# Altium PCB PCB尺子1.pcbdoc (part 1 of 2)
Units mm, origin at the board's own origin, x right, y up, seen from the top; angles counter-clockwise.
Board outline 210 x 40 mm, 2 copper layers (Top Layer, Bottom Layer); 15 components, 42 nets, 33 pads, 0 vias.
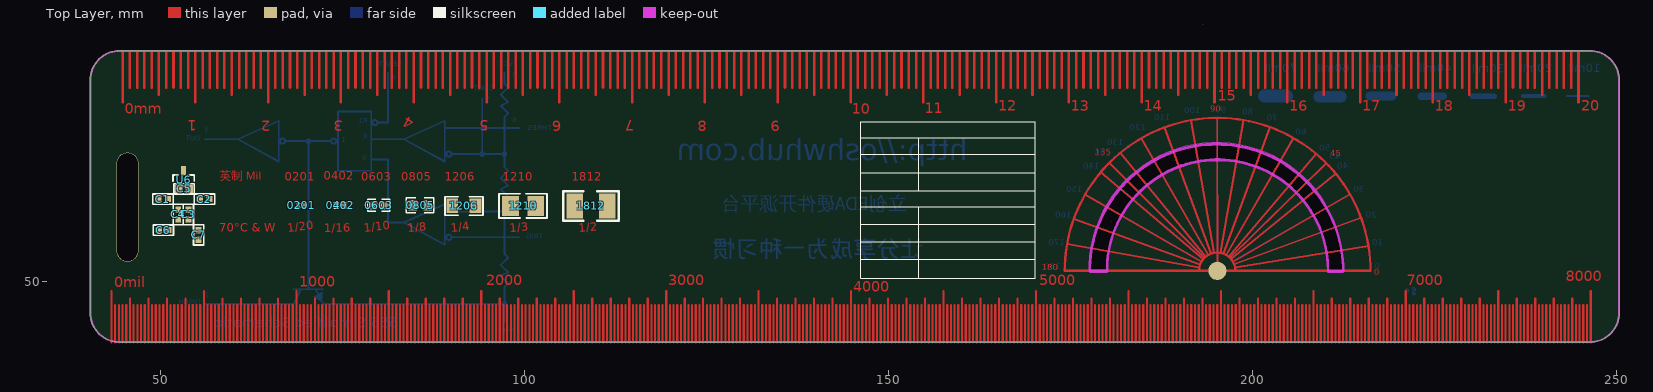
[diagram p0: Top Layer view]
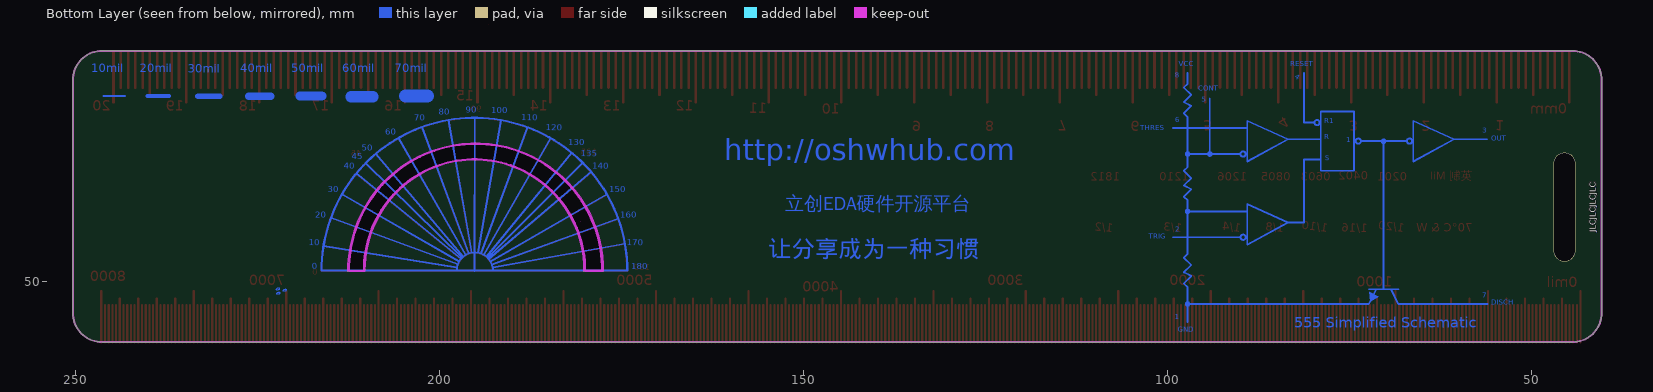
[diagram p1: Bottom Layer view, seen from below]

## Layer stack, top to bottom
Top Solder: solder mask 0.0102, Solder Resist, Dk 3.5
Top Layer: signal copper 0.0356
Dielectric1: dielectric 0.32, FR-4, Dk 4.8
Bottom Layer: signal copper 0.0356
Bottom Solder: solder mask 0.0102, Solder Resist, Dk 3.5

## Board outline
40.4,45.653 40.4,77.653 cw(c44.4,77.653) 44.4,81.653 246.4,81.653 cw(c246.4,77.653) 250.4,77.653 250.4,45.653 cw(c246.4,45.653) 246.4,41.653 44.4,41.653 cw(c44.4,45.653)
cut-out: 177.69,51.442 177.688,52.064 177.772,53.307 177.945,54.541 178.206,55.759 178.553,56.955 178.985,58.123 179.499,59.257 180.093,60.352 180.764,61.401 181.509,62.4 182.322,63.343 183.202,64.225 184.142,65.042 185.138,65.79 186.185,66.464 187.278,67.062 188.41,67.581 189.577,68.016 190.772,68.368 191.989,68.633 193.222,68.81 194.464,68.898 195.71,68.898 196.952,68.808 198.185,68.629 199.402,68.363 200.596,68.011 201.763,67.574 202.895,67.055 203.987,66.456 205.033,65.78 206.029,65.031 206.968,64.213 207.846,63.33 208.659,62.387 209.403,61.387 210.072,60.337 210.666,59.242 211.179,58.107 211.61,56.938 211.956,55.742 212.215,54.524 212.387,53.29 212.47,52.047 212.467,51.425 210.426,51.425 210.42,52.025 210.337,53.222 210.16,54.409 209.89,55.578 209.528,56.722 209.078,57.834 208.54,58.907 207.92,59.935 207.221,60.91 206.447,61.827 205.603,62.68 204.694,63.463 203.726,64.173 202.706,64.804 201.638,65.352 200.531,65.815 199.391,66.188 198.224,66.471 197.04,66.66 195.843,66.756 194.643,66.756 193.447,66.662 192.262,66.474 191.095,66.193 189.955,65.821 188.847,65.36 187.779,64.812 186.757,64.183 185.789,63.474 184.879,62.691 184.034,61.839 183.259,60.923 182.559,59.949 181.937,58.922 181.399,57.85 180.947,56.738 180.584,55.594 180.313,54.426 180.134,53.239 180.05,52.042 180.044,51.442 180.043,51.442
cut-out: 180.721,58.166

## Design rules (kind name [scope] priority, off if disabled: settings)
Clearance [All] p1: gap=0.254 ignorepadtopadclearanceinfootprint=FALSE except(0: Arc-Hole Track-Hole SMDPad-Hole THPad-Hole Via-Hole Fill-Hole Poly-Hole Region-Hole Text-Hole)
PolygonConnect [All] p1: connectstyle=Relief reliefconductorwidth=0.254 reliefentries=4 polygonreliefangle="90 Angle" airgapwidth=0.254
RoutingVias [All] p1: holewidth=0.711 width=1.27 viastyle="Through Hole" minholewidth=0.711 minwidth=1.27 maxholewidth=0.711 maxwidth=1.27
SolderMaskExpansion [All] p1: expansion=0.102
Width [All] p1: maxlimit=0.254 minlimit=0.254 preferedwidth=0.254
30 further rules are at their usual default settings.

## Components (designator, comment, footprint, x,y, rotation, side; value= is the part's Value field where it differs from the comment)
0201 "0201" 0201 69.385,60.439 r0 top
0402 "0402" 0402 74.716,60.439 r0 top
0603 "0603" 0603 80.016,60.439 r0 top
0805 "0805" 0805 85.7,60.439 r0 top
1206 "1206" 1206 91.707,60.353 r0 top
1210 "1210" 1210 99.846,60.353 r0 top
1812 "1812" 1812 109.15,60.353 r0 top
C1 "C0402" C0402 50.366,61.289 r180 top
C2 "C0402" C0402 56.066,61.289 r180 top
C3 "C0402" C0402 53.866,59.189 r90 top
C4 "C0402" C0402 52.466,59.189 r90 top
C5 "C0402" C0402 53.266,62.689 r0 top
C6 "C0402" C0402 50.416,57.039 r180 top
C7 "C0402" C0402 55.266,56.389 r90 top
U6 "SOT-23(SOT-23-3)" SOT-23(SOT-23-3) 53.216,63.939 r0 top

## Footprints (in the part's own frame and the unit in brackets; to place one, negate y for a bottom-side part, rotate by r counter-clockwise, add the part's x,y. Pads: shape width x height; smd on the part's side, far side on the other; paste and mask are expansions set on the pad)
0201 [mil]
  rect 13.8x16 smd: 1(-13,0)
  rect 13.78x16 smd: 2(13,0)
  silkscreen extent -23,-11 23,11
0402 [mm]
  rect 0.6x0.65 smd: 1(-0.424,0) 2(0.424,0)
  silkscreen extent -0.82,-0.43 0.81,0.43
0603 [mm]
  rect 1x1.1 smd: 1(-0.7,0) 2(0.7,0)
  silkscreen extent -1.5,-0.8 1.5,0.8
0805 [mm]
  rect 1.16x1.45 smd: 1(-1.016,0) 2(1.016,0)
  silkscreen extent -1.9,-1.03 1.87,1.04
1206 [mm]
  rect 1.6x2 smd: 1(-1.6,0) 2(1.6,0)
  silkscreen extent -2.61,-1.27 2.62,1.27
1210 [mil]
  rect 90.56x106.3 smd: 1(-68,0) 2(68,0)
  silkscreen extent -130,-65 129,66
1812 [mil]
  rect 90x133.86 smd: 1(-88,0) 2(88,0)
  silkscreen extent -150,-80 150,80
C0402 [mil]
  rect 35.4x31.5 smd: 1(-25.6,0) 2(25.6,0)
  silkscreen extent -55,-28 55,28
SOT-23(SOT-23-3) [mm]
  rect 0.7x1.25 smd: 1(-0.95,-1.25) 2(0.95,-1.25) 3(0,1.25)
  silkscreen extent -1.46,-0.9 1.46,0.65

## Free pads (board coordinates)
  oval 3x15 hole 2.8 slot 14.8 at 90 deg copper offset 0,0: 1(45.5,60.203)
  round 2.5 smd: 3(195.216,51.439)

## Nets (pads, with @x,y where several pads share a name; then routed paths per layer and width w, separated by ;. In a path a pad name is that pad's centre, name@x,y a point inside that pad or via, vN(x,y) a via of type N, cw(c..) or ccw(c..) an arc to the next point about the centre after c; other vN are vias at no path point)
1: pad.3 | length 470
  Top Layer w0.254: 174.576,55.137 192.74,51.893 ; 175.495,58.576 192.851,52.305 ; 177.049,61.928 193.034,52.698 ; 179.208,65.005 193.28,53.051 ; 180.378,66.28 193.429,53.214 ; 181.878,67.646 193.588,53.36 ; 184.778,69.656 193.945,53.61 ; 187.965,71.149 194.341,53.795 ; 191.578,72.129 194.765,53.919 ; 195.204,72.453 pad.3@195.216,51.439 ; 195.625,53.906 198.799,72.151 ; 196.042,53.794 202.46,71.176 ; 196.435,53.611 205.666,69.688 ; 196.786,53.365 208.778,67.515 ; 196.95,53.216 210.17,66.231 ; 197.089,53.064 211.461,64.802 ; 197.342,52.706 213.434,61.957 ; 197.521,52.33 214.952,58.721 ; 197.643,51.878 215.974,54.846
  Top Layer w0.3: 192.701,51.456 cw(c195.19,51.456) 197.679,51.456 ; 174.25,51.453 cw(c195.25,51.453) 216.25,51.453 174.25,51.453
null: 
S$67: 
S$69: 
S$4983:  | length 7
  Top Layer w0.35: 44.822,74.625 44.822,81.625
S$4985:  | length 95
  Top Layer w0.35: 45.822,76.625 45.822,81.625 ; 55.822,76.625 55.822,81.625 ; 65.822,76.625 65.822,81.625 ; 75.822,76.625 75.822,81.625 ; 85.822,76.625 85.822,81.625 ; 95.822,76.625 95.822,81.625 ; 105.822,76.625 105.822,81.625 ; 115.822,76.625 115.822,81.625 ; 125.822,76.625 125.822,81.625 ; 135.822,76.625 135.822,81.625 ; 145.822,76.625 145.822,81.625 ; 155.822,76.625 155.822,81.625 ; 165.822,76.625 165.822,81.625 ; 175.822,76.625 175.822,81.625 ; 185.822,76.625 185.822,81.625 ; 195.822,76.625 195.822,81.625 ; 215.822,76.625 215.822,81.625 ; 225.822,76.625 225.822,81.625 ; 235.822,76.625 235.822,81.625
S$4987:  | length 100
  Top Layer w0.35: 46.822,76.625 46.822,81.625 ; 56.822,76.625 56.822,81.625 ; 66.822,76.625 66.822,81.625 ; 76.822,76.625 76.822,81.625 ; 86.822,76.625 86.822,81.625 ; 96.822,76.625 96.822,81.625 ; 106.822,76.625 106.822,81.625 ; 116.822,76.625 116.822,81.625 ; 126.822,76.625 126.822,81.625 ; 136.822,76.625 136.822,81.625 ; 146.822,76.625 146.822,81.625 ; 156.822,76.625 156.822,81.625 ; 166.822,76.625 166.822,81.625 ; 176.822,76.625 176.822,81.625 ; 186.822,76.625 186.822,81.625 ; 196.822,76.625 196.822,81.625 ; 206.822,76.625 206.822,81.625 ; 216.822,76.625 216.822,81.625 ; 226.822,76.625 226.822,81.625 ; 236.822,76.625 236.822,81.625
S$4989:  | length 100
  Top Layer w0.35: 47.822,76.625 47.822,81.625 ; 57.822,76.625 57.822,81.625 ; 67.822,76.625 67.822,81.625 ; 77.822,76.625 77.822,81.625 ; 87.822,76.625 87.822,81.625 ; 97.822,76.625 97.822,81.625 ; 107.822,76.625 107.822,81.625 ; 117.822,76.625 117.822,81.625 ; 127.822,76.625 127.822,81.625 ; 137.822,76.625 137.822,81.625 ; 147.822,76.625 147.822,81.625 ; 157.822,76.625 157.822,81.625 ; 167.822,76.625 167.822,81.625 ; 177.822,76.625 177.822,81.625 ; 187.822,76.625 187.822,81.625 ; 197.822,76.625 197.822,81.625 ; 207.822,76.625 207.822,81.625 ; 217.822,76.625 217.822,81.625 ; 227.822,76.625 227.822,81.625 ; 237.822,76.625 237.822,81.625
S$4991:  | length 100
  Top Layer w0.35: 48.822,76.625 48.822,81.625 ; 58.822,76.625 58.822,81.625 ; 68.822,76.625 68.822,81.625 ; 78.822,76.625 78.822,81.625 ; 88.822,76.625 88.822,81.625 ; 98.822,76.625 98.822,81.625 ; 108.822,76.625 108.822,81.625 ; 118.822,76.625 118.822,81.625 ; 128.822,76.625 128.822,81.625 ; 138.822,76.625 138.822,81.625 ; 148.822,76.625 148.822,81.625 ; 158.822,76.625 158.822,81.625 ; 168.822,76.625 168.822,81.625 ; 178.822,76.625 178.822,81.625 ; 188.822,76.625 188.822,81.625 ; 198.822,76.625 198.822,81.625 ; 208.822,76.625 208.822,81.625 ; 218.822,76.625 218.822,81.625 ; 228.822,76.625 228.822,81.625 ; 238.822,76.625 238.822,81.625
S$4993:  | length 120
  Top Layer w0.35: 49.822,75.625 49.822,81.625 ; 59.822,75.625 59.822,81.625 ; 69.822,75.625 69.822,81.625 ; 79.822,75.625 79.822,81.625 ; 89.822,75.625 89.822,81.625 ; 99.822,75.625 99.822,81.625 ; 109.822,75.625 109.822,81.625 ; 119.822,75.625 119.822,81.625 ; 129.822,75.625 129.822,81.625 ; 139.822,75.625 139.822,81.625 ; 149.822,75.625 149.822,81.625 ; 159.822,75.625 159.822,81.625 ; 169.822,75.625 169.822,81.625 ; 179.822,75.625 179.822,81.625 ; 189.822,75.625 189.822,81.625 ; 199.822,75.625 199.822,81.625 ; 209.822,75.625 209.822,81.625 ; 219.822,75.625 219.822,81.625 ; 229.822,75.625 229.822,81.625 ; 239.822,75.625 239.822,81.625
S$4995:  | length 100
  Top Layer w0.35: 50.822,76.625 50.822,81.625 ; 60.822,76.625 60.822,81.625 ; 70.822,76.625 70.822,81.625 ; 80.822,76.625 80.822,81.625 ; 90.822,76.625 90.822,81.625 ; 100.822,76.625 100.822,81.625 ; 110.822,76.625 110.822,81.625 ; 120.822,76.625 120.822,81.625 ; 130.822,76.625 130.822,81.625 ; 140.822,76.625 140.822,81.625 ; 150.822,76.625 150.822,81.625 ; 160.822,76.625 160.822,81.625 ; 170.822,76.625 170.822,81.625 ; 180.822,76.625 180.822,81.625 ; 190.822,76.625 190.822,81.625 ; 200.822,76.625 200.822,81.625 ; 210.822,76.625 210.822,81.625 ; 220.822,76.625 220.822,81.625 ; 230.822,76.625 230.822,81.625 ; 240.822,76.625 240.822,81.625
S$4997:  | length 100
  Top Layer w0.35: 51.822,76.625 51.822,81.625 ; 61.822,76.625 61.822,81.625 ; 71.822,76.625 71.822,81.625 ; 81.822,76.625 81.822,81.625 ; 91.822,76.625 91.822,81.625 ; 101.822,76.625 101.822,81.625 ; 111.822,76.625 111.822,81.625 ; 121.822,76.625 121.822,81.625 ; 131.822,76.625 131.822,81.625 ; 141.822,76.625 141.822,81.625 ; 151.822,76.625 151.822,81.625 ; 161.822,76.625 161.822,81.625 ; 171.822,76.625 171.822,81.625 ; 181.822,76.625 181.822,81.625 ; 191.822,76.625 191.822,81.625 ; 201.822,76.625 201.822,81.625 ; 211.822,76.625 211.822,81.625 ; 221.822,76.625 221.822,81.625 ; 231.822,76.625 231.822,81.625 ; 241.822,76.625 241.822,81.625
S$4999:  | length 100
  Top Layer w0.35: 52.822,76.625 52.822,81.625 ; 62.822,76.625 62.822,81.625 ; 72.822,76.625 72.822,81.625 ; 82.822,76.625 82.822,81.625 ; 92.822,76.625 92.822,81.625 ; 102.822,76.625 102.822,81.625 ; 112.822,76.625 112.822,81.625 ; 122.822,76.625 122.822,81.625 ; 132.822,76.625 132.822,81.625 ; 142.822,76.625 142.822,81.625 ; 152.822,76.625 152.822,81.625 ; 162.822,76.625 162.822,81.625 ; 172.822,76.625 172.822,81.625 ; 182.822,76.625 182.822,81.625 ; 192.822,76.625 192.822,81.625 ; 202.822,76.625 202.822,81.625 ; 212.822,76.625 212.822,81.625 ; 222.822,76.625 222.822,81.625 ; 232.822,76.625 232.822,81.625 ; 242.822,76.625 242.822,81.625
S$5001:  | length 100
  Top Layer w0.35: 53.822,76.625 53.822,81.625 ; 63.822,76.625 63.822,81.625 ; 73.822,76.625 73.822,81.625 ; 83.822,76.625 83.822,81.625 ; 93.822,76.625 93.822,81.625 ; 103.822,76.625 103.822,81.625 ; 113.822,76.625 113.822,81.625 ; 123.822,76.625 123.822,81.625 ; 133.822,76.625 133.822,81.625 ; 143.822,76.625 143.822,81.625 ; 153.822,76.625 153.822,81.625 ; 163.822,76.625 163.822,81.625 ; 173.822,76.625 173.822,81.625 ; 183.822,76.625 183.822,81.625 ; 193.822,76.625 193.822,81.625 ; 203.822,76.625 203.822,81.625 ; 213.822,76.625 213.822,81.625 ; 223.822,76.625 223.822,81.625 ; 233.822,76.625 233.822,81.625 ; 243.822,76.625 243.822,81.625
S$5003:  | length 140
  Top Layer w0.35: 54.822,74.625 54.822,81.625 ; 64.822,74.625 64.822,81.625 ; 74.822,74.625 74.822,81.625 ; 84.822,74.625 84.822,81.625 ; 94.822,74.625 94.822,81.625 ; 104.822,74.625 104.822,81.625 ; 114.822,74.625 114.822,81.625 ; 124.822,74.625 124.822,81.625 ; 134.822,74.625 134.822,81.625 ; 144.822,74.625 144.822,81.625 ; 154.822,74.625 154.822,81.625 ; 164.822,74.625 164.822,81.625 ; 174.822,74.625 174.822,81.625 ; 184.822,74.625 184.822,81.625 ; 194.822,74.625 194.822,81.625 ; 204.822,74.625 204.822,81.625 ; 214.822,74.625 214.822,81.625 ; 224.822,74.625 224.822,81.625 ; 234.822,74.625 234.822,81.625 ; 244.822,74.625 244.822,81.625
S$6628:  | length 213.4
  Top Layer w0.3: 44.314,41.638 44.314,46.21 44.314,46.718 ; 49.394,41.638 49.394,46.21 49.394,46.718 ; 54.474,41.638 54.474,46.21 54.474,46.718 ; 59.554,41.638 59.554,46.21 59.554,46.718 ; 64.634,41.638 64.634,46.21 64.634,46.718 ; 69.714,41.638 69.714,46.21 69.714,46.718 ; 74.794,41.638 74.794,46.21 74.794,46.718 ; 79.874,41.638 79.874,46.21 79.874,46.718 ; 84.954,41.638 84.954,46.21 84.954,46.718 ; 90.034,41.638 90.034,46.21 90.034,46.718 ; 95.114,41.638 95.114,46.21 95.114,46.718 ; 100.194,41.638 100.194,46.21 100.194,46.718 ; 105.274,41.638 105.274,46.21 105.274,46.718 ; 110.354,41.638 110.354,46.21 110.354,46.718 ; 115.434,41.638 115.434,46.21 115.434,46.718 ; 120.514,41.638 120.514,46.21 120.514,46.718 ; 125.594,41.638 125.594,46.21 125.594,46.718 ; 130.674,41.638 130.674,46.21 130.674,46.718 ; 135.754,41.638 135.754,46.21 135.754,46.718 ; 140.834,41.638 140.834,46.21 140.834,46.718 ; 145.914,41.638 145.914,46.21 145.914,46.718 ; 150.994,41.638 150.994,46.21 150.994,46.718 ; 156.074,41.638 156.074,46.21 156.074,46.718 ; 158.614,41.638 158.614,46.21 158.614,46.718 ; 163.694,41.638 163.694,46.21 163.694,46.718 ; 168.774,41.638 168.774,46.21 168.774,46.718 ; 173.854,41.638 173.854,46.21 173.854,46.718 ; 178.934,41.638 178.934,46.21 178.934,46.718 ; 184.014,41.638 184.014,46.21 184.014,46.718 ; 189.094,41.638 189.094,46.21 189.094,46.718 ; 194.174,41.638 194.174,46.21 194.174,46.718 ; 196.714,41.638 196.714,46.21 196.714,46.718 ; 201.794,41.638 201.794,46.21 201.794,46.718 ; 206.874,41.638 206.874,46.21 206.874,46.718 ; 211.954,41.638 211.954,46.21 211.954,46.718 ; 217.034,41.638 217.034,46.21 217.034,46.718 ; 222.114,41.638 222.114,46.21 222.114,46.718 ; 227.194,41.638 227.194,46.21 227.194,46.718 ; 232.274,41.638 232.274,46.21 232.274,46.718 ; 234.814,41.638 234.814,46.21 234.814,46.718 ; 239.894,41.638 239.894,46.21 239.894,46.718 ; 244.974,41.638 244.974,46.21 244.974,46.718
S$6631:  | length 213.4
  Top Layer w0.3: 43.806,41.638 43.806,46.718 ; 48.886,41.638 48.886,46.718 ; 53.966,41.638 53.966,46.718 ; 59.046,41.638 59.046,46.718 ; 64.126,41.638 64.126,46.718 ; 69.206,41.638 69.206,46.718 ; 74.286,41.638 74.286,46.718 ; 79.366,41.638 79.366,46.718 ; 84.446,41.638 84.446,46.718 ; 89.526,41.638 89.526,46.718 ; 94.606,41.638 94.606,46.718 ; 99.686,41.638 99.686,46.718 ; 104.766,41.638 104.766,46.718 ; 109.846,41.638 109.846,46.718 ; 114.926,41.638 114.926,46.718 ; 120.006,41.638 120.006,46.718 ; 125.086,41.638 125.086,46.718 ; 130.166,41.638 130.166,46.718 ; 135.246,41.638 135.246,46.718 ; 140.326,41.638 140.326,46.718 ; 145.406,41.638 145.406,46.718 ; 150.486,41.638 150.486,46.718 ; 155.566,41.638 155.566,46.718 ; 158.106,41.638 158.106,46.718 ; 163.186,41.638 163.186,46.718 ; 168.266,41.638 168.266,46.718 ; 173.346,41.638 173.346,46.718 ; 178.426,41.638 178.426,46.718 ; 183.506,41.638 183.506,46.718 ; 188.586,41.638 188.586,46.718 ; 193.666,41.638 193.666,46.718 ; 196.206,41.638 196.206,46.718 ; 201.286,41.638 201.286,46.718 ; 206.366,41.638 206.366,46.718 ; 211.446,41.638 211.446,46.718 ; 216.526,41.638 216.526,46.718 ; 221.606,41.638 221.606,46.718 ; 226.686,41.638 226.686,46.718 ; 231.766,41.638 231.766,46.718 ; 234.306,41.638 234.306,46.718 ; 239.386,41.638 239.386,46.718 ; 244.466,41.638 244.466,46.718
S$6633:  | length 213.4
  Top Layer w0.3: 44.822,41.638 44.822,46.718 ; 49.902,41.638 49.902,46.718 ; 54.982,41.638 54.982,46.718 ; 60.062,41.638 60.062,46.718 ; 65.142,41.638 65.142,46.718 ; 70.222,41.638 70.222,46.718 ; 75.302,41.638 75.302,46.718 ; 80.382,41.638 80.382,46.718 ; 85.462,41.638 85.462,46.718 ; 90.542,41.638 90.542,46.718 ; 95.622,41.638 95.622,46.718 ; 100.702,41.638 100.702,46.718 ; 105.782,41.638 105.782,46.718 ; 110.862,41.638 110.862,46.718 ; 115.942,41.638 115.942,46.718 ; 121.022,41.638 121.022,46.718 ; 126.102,41.638 126.102,46.718 ; 131.182,41.638 131.182,46.718 ; 136.262,41.638 136.262,46.718 ; 141.342,41.638 141.342,46.718 ; 146.422,41.638 146.422,46.718 ; 151.502,41.638 151.502,46.718 ; 156.582,41.638 156.582,46.718 ; 159.122,41.638 159.122,46.718 ; 164.202,41.638 164.202,46.718 ; 169.282,41.638 169.282,46.718 ; 174.362,41.638 174.362,46.718 ; 179.442,41.638 179.442,46.718 ; 184.522,41.638 184.522,46.718 ; 189.602,41.638 189.602,46.718 ; 194.682,41.638 194.682,46.718 ; 197.222,41.638 197.222,46.718 ; 202.302,41.638 202.302,46.718 ; 207.382,41.638 207.382,46.718 ; 212.462,41.638 212.462,46.718 ; 217.542,41.638 217.542,46.718 ; 222.622,41.638 222.622,46.718 ; 227.702,41.638 227.702,46.718 ; 232.782,41.638 232.782,46.718 ; 235.322,41.638 235.322,46.718 ; 240.402,41.638 240.402,46.718 ; 245.482,41.638 245.482,46.718
S$6635:  | length 213.4
  Top Layer w0.3: 45.33,41.638 45.33,46.718 ; 50.41,41.638 50.41,46.718 ; 55.49,41.638 55.49,46.718 ; 60.57,41.638 60.57,46.718 ; 65.65,41.638 65.65,46.718 ; 70.73,41.638 70.73,46.718 ; 75.81,41.638 75.81,46.718 ; 80.89,41.638 80.89,46.718 ; 85.97,41.638 85.97,46.718 ; 91.05,41.638 91.05,46.718 ; 96.13,41.638 96.13,46.718 ; 101.21,41.638 101.21,46.718 ; 106.29,41.638 106.29,46.718 ; 111.37,41.638 111.37,46.718 ; 116.45,41.638 116.45,46.718 ; 121.53,41.638 121.53,46.718 ; 126.61,41.638 126.61,46.718 ; 131.69,41.638 131.69,46.718 ; 136.77,41.638 136.77,46.718 ; 141.85,41.638 141.85,46.718 ; 146.93,41.638 146.93,46.718 ; 152.01,41.638 152.01,46.718 ; 157.09,41.638 157.09,46.718 ; 159.63,41.638 159.63,46.718 ; 164.71,41.638 164.71,46.718 ; 169.79,41.638 169.79,46.718 ; 174.87,41.638 174.87,46.718 ; 179.95,41.638 179.95,46.718 ; 185.03,41.638 185.03,46.718 ; 190.11,41.638 190.11,46.718 ; 195.19,41.638 195.19,46.718 ; 197.73,41.638 197.73,46.718 ; 202.81,41.638 202.81,46.718 ; 207.89,41.638 207.89,46.718 ; 212.97,41.638 212.97,46.718 ; 218.05,41.638 218.05,46.718 ; 223.13,41.638 223.13,46.718 ; 228.21,41.638 228.21,46.718 ; 233.29,41.638 233.29,46.718 ; 235.83,41.638 235.83,46.718 ; 240.91,41.638 240.91,46.718 ; 245.99,41.638 245.99,46.718
S$6637:  | length 260.9
  Top Layer w0.3: 45.838,41.638 45.838,47.607 ; 50.918,41.638 50.918,47.607 ; 55.998,41.638 55.998,48.623 ; 61.078,41.638 61.078,47.607 ; 66.158,41.638 66.158,47.607 ; 71.238,41.638 71.238,47.607 ; 76.318,41.638 76.318,47.607 ; 81.398,41.638 81.398,48.623 ; 86.478,41.638 86.478,47.607 ; 91.558,41.638 91.558,47.607 ; 96.638,41.638 96.638,47.607 ; 101.718,41.638 101.718,47.607 ; 106.798,41.638 106.798,48.623 ; 111.878,41.638 111.878,47.607 ; 116.958,41.638 116.958,47.607 ; 122.038,41.638 122.038,47.607 ; 127.118,41.638 127.118,47.607 ; 132.198,41.638 132.198,48.623 ; 137.278,41.638 137.278,47.607 ; 142.358,41.638 142.358,47.607 ; 147.438,41.638 147.438,47.607 ; 152.518,41.638 152.518,47.607 ; 157.598,41.638 157.598,48.623 ; 160.138,41.638 160.138,47.607 ; 165.218,41.638 165.218,47.607 ; 170.298,41.638 170.298,48.623 ; 175.378,41.638 175.378,47.607 ; 180.458,41.638 180.458,47.607 ; 185.538,41.638 185.538,47.607 ; 190.618,41.638 190.618,47.607 ; 195.698,41.638 195.698,48.623 ; 198.238,41.638 198.238,47.607 ; 203.318,41.638 203.318,47.607 ; 208.398,41.638 208.398,48.623 ; 213.478,41.638 213.478,47.607 ; 218.558,41.638 218.558,47.607 ; 223.638,41.638 223.638,47.607 ; 228.718,41.638 228.718,47.607 ; 233.798,41.638 233.798,48.623 ; 236.338,41.638 236.338,47.607 ; 241.418,41.638 241.418,47.607 ; 246.498,41.638 246.498,48.623
S$6640:  | length 193
  Top Layer w0.3: 46.346,41.638 46.346,46.718 ; 51.426,41.638 51.426,46.718 ; 56.506,41.638 56.506,46.718 ; 61.586,41.638 61.586,46.718 ; 66.666,41.638 66.666,46.718 ; 71.746,41.638 71.746,46.718 ; 76.826,41.638 76.826,46.718 ; 81.906,41.638 81.906,46.718 ; 86.986,41.638 86.986,46.718 ; 92.066,41.638 92.066,46.718 ; 97.146,41.638 97.146,46.718 ; 102.226,41.638 102.226,46.718 ; 107.306,41.638 107.306,46.718 ; 112.386,41.638 112.386,46.718 ; 117.466,41.638 117.466,46.718 ; 122.546,41.638 122.546,46.718 ; 127.626,41.638 127.626,46.718 ; 132.706,41.638 132.706,46.718 ; 137.786,41.638 137.786,46.718 ; 142.866,41.638 142.866,46.718 ; 147.946,41.638 147.946,46.718 ; 153.026,41.638 153.026,46.718 ; 160.646,41.638 160.646,46.718 ; 165.726,41.638 165.726,46.718 ; 170.806,41.638 170.806,46.718 ; 175.886,41.638 175.886,46.718 ; 180.966,41.638 180.966,46.718 ; 186.046,41.638 186.046,46.718 ; 191.126,41.638 191.126,46.718 ; 198.746,41.638 198.746,46.718 ; 203.826,41.638 203.826,46.718 ; 208.906,41.638 208.906,46.718 ; 213.986,41.638 213.986,46.718 ; 219.066,41.638 219.066,46.718 ; 224.146,41.638 224.146,46.718 ; 229.226,41.638 229.226,46.718 ; 236.846,41.638 236.846,46.718 ; 241.926,41.638 241.926,46.718
S$6642:  | length 193
  Top Layer w0.3: 46.854,41.638 46.854,46.718 ; 51.934,41.638 51.934,46.718 ; 57.014,41.638 57.014,46.718 ; 62.094,41.638 62.094,46.718 ; 67.174,41.638 67.174,46.718 ; 72.254,41.638 72.254,46.718 ; 77.334,41.638 77.334,46.718 ; 82.414,41.638 82.414,46.718 ; 87.494,41.638 87.494,46.718 ; 92.574,41.638 92.574,46.718 ; 97.654,41.638 97.654,46.718 ; 102.734,41.638 102.734,46.718 ; 107.814,41.638 107.814,46.718 ; 112.894,41.638 112.894,46.718 ; 117.974,41.638 117.974,46.718 ; 123.054,41.638 123.054,46.718 ; 128.134,41.638 128.134,46.718 ; 133.214,41.638 133.214,46.718 ; 138.294,41.638 138.294,46.718 ; 143.374,41.638 143.374,46.718 ; 148.454,41.638 148.454,46.718 ; 153.534,41.638 153.534,46.718 ; 161.154,41.638 161.154,46.718 ; 166.234,41.638 166.234,46.718 ; 171.314,41.638 171.314,46.718 ; 176.394,41.638 176.394,46.718 ; 181.474,41.638 181.474,46.718 ; 186.554,41.638 186.554,46.718 ; 191.634,41.638 191.634,46.718 ; 199.254,41.638 199.254,46.718 ; 204.334,41.638 204.334,46.718 ; 209.414,41.638 209.414,46.718 ; 214.494,41.638 214.494,46.718 ; 219.574,41.638 219.574,46.718 ; 224.654,41.638 224.654,46.718 ; 229.734,41.638 229.734,46.718 ; 237.354,41.638 237.354,46.718 ; 242.434,41.638 242.434,46.718
S$6644:  | length 193
  Top Layer w0.3: 47.362,41.638 47.362,46.718 ; 52.442,41.638 52.442,46.718 ; 57.522,41.638 57.522,46.718 ; 62.602,41.638 62.602,46.718 ; 67.682,41.638 67.682,46.718 ; 72.762,41.638 72.762,46.718 ; 77.842,41.638 77.842,46.718 ; 82.922,41.638 82.922,46.718 ; 88.002,41.638 88.002,46.718 ; 93.082,41.638 93.082,46.718 ; 98.162,41.638 98.162,46.718 ; 103.242,41.638 103.242,46.718 ; 108.322,41.638 108.322,46.718 ; 113.402,41.638 113.402,46.718 ; 118.482,41.638 118.482,46.718 ; 123.562,41.638 123.562,46.718 ; 128.642,41.638 128.642,46.718 ; 133.722,41.638 133.722,46.718 ; 138.802,41.638 138.802,46.718 ; 143.882,41.638 143.882,46.718 ; 148.962,41.638 148.962,46.718 ; 154.042,41.638 154.042,46.718 ; 161.662,41.638 161.662,46.718 ; 166.742,41.638 166.742,46.718 ; 171.822,41.638 171.822,46.718 ; 176.902,41.638 176.902,46.718 ; 181.982,41.638 181.982,46.718 ; 187.062,41.638 187.062,46.718 ; 192.142,41.638 192.142,46.718 ; 199.762,41.638 199.762,46.718 ; 204.842,41.638 204.842,46.718 ; 209.922,41.638 209.922,46.718 ; 215.002,41.638 215.002,46.718 ; 220.082,41.638 220.082,46.718 ; 225.162,41.638 225.162,46.718 ; 230.242,41.638 230.242,46.718 ; 237.862,41.638 237.862,46.718 ; 242.942,41.638 242.942,46.718
S$6646:  | length 193
  Top Layer w0.3: 47.87,41.638 47.87,46.718 ; 52.95,41.638 52.95,46.718 ; 58.03,41.638 58.03,46.718 ; 63.11,41.638 63.11,46.718 ; 68.19,41.638 68.19,46.718 ; 73.27,41.638 73.27,46.718 ; 78.35,41.638 78.35,46.718 ; 83.43,41.638 83.43,46.718 ; 88.51,41.638 88.51,46.718 ; 93.59,41.638 93.59,46.718 ; 98.67,41.638 98.67,46.718 ; 103.75,41.638 103.75,46.718 ; 108.83,41.638 108.83,46.718 ; 113.91,41.638 113.91,46.718 ; 118.99,41.638 118.99,46.718 ; 124.07,41.638 124.07,46.718 ; 129.15,41.638 129.15,46.718 ; 134.23,41.638 134.23,46.718 ; 139.31,41.638 139.31,46.718 ; 144.39,41.638 144.39,46.718 ; 149.47,41.638 149.47,46.718 ; 154.55,41.638 154.55,46.718 ; 162.17,41.638 162.17,46.718 ; 167.25,41.638 167.25,46.718 ; 172.33,41.638 172.33,46.718 ; 177.41,41.638 177.41,46.718 ; 182.49,41.638 182.49,46.718 ; 187.57,41.638 187.57,46.718 ; 192.65,41.638 192.65,46.718 ; 200.27,41.638 200.27,46.718 ; 205.35,41.638 205.35,46.718 ; 210.43,41.638 210.43,46.718 ; 215.51,41.638 215.51,46.718 ; 220.59,41.638 220.59,46.718 ; 225.67,41.638 225.67,46.718 ; 230.75,41.638 230.75,46.718 ; 238.37,41.638 238.37,46.718 ; 243.45,41.638 243.45,46.718
S$6648:  | length 232.9
  Top Layer w0.3: 48.378,41.638 48.378,47.607 ; 53.458,41.638 53.458,47.607 ; 58.538,41.638 58.538,47.607 ; 63.618,41.638 63.618,47.607 ; 68.698,41.638 68.698,48.623 ; 73.778,41.638 73.778,47.607 ; 78.858,41.638 78.858,47.607 ; 83.938,41.638 83.938,47.607 ; 89.018,41.638 89.018,47.607 ; 94.098,41.638 94.098,48.623 ; 99.178,41.638 99.178,47.607 ; 104.258,41.638 104.258,47.607 ; 109.338,41.638 109.338,47.607 ; 114.418,41.638 114.418,47.607 ; 119.498,41.638 119.498,48.623 ; 124.578,41.638 124.578,47.607 ; 129.658,41.638 129.658,47.607 ; 134.738,41.638 134.738,47.607 ; 139.818,41.638 139.818,47.607 ; 144.898,41.638 144.898,48.623 ; 149.978,41.638 149.978,47.607 ; 155.058,41.638 155.058,47.607 ; 162.678,41.638 162.678,47.607 ; 167.758,41.638 167.758,47.607 ; 172.838,41.638 172.838,47.607 ; 177.918,41.638 177.918,47.607 ; 182.998,41.638 182.998,48.623 ; 188.078,41.638 188.078,47.607 ; 193.158,41.638 193.158,47.607 ; 200.778,41.638 200.778,47.607 ; 205.858,41.638 205.858,47.607 ; 210.938,41.638 210.938,47.607 ; 216.018,41.638 216.018,47.607 ; 221.098,41.638 221.098,48.623 ; 226.178,41.638 226.178,47.607 ; 231.258,41.638 231.258,47.607 ; 238.878,41.638 238.878,47.607 ; 243.958,41.638 243.958,47.607
S$6650:  | length 7
  Top Layer w0.3: 43.298,41.638 43.298,48.623
S$7269: 
S$14789:  | length 470
  Bottom Layer w0.254: 174.57,55.151 192.735,51.907 ; 175.49,58.59 192.846,52.319 ; 177.043,61.942 193.028,52.712 ; 179.203,65.019 193.275,53.065 ; 180.373,66.294 193.424,53.228 ; 181.873,67.66 193.583,53.374 ; 184.773,69.67 193.939,53.624 ; 187.96,71.163 194.336,53.809 ; 191.572,72.143 194.752,53.92 ; 192.696,51.47 cw(c195.185,51.47) 197.674,51.47 ; 195.199,72.467 195.216,51.439 ; 195.62,53.92 198.793,72.165 ; 196.036,53.808 202.455,71.19 ; 196.429,53.625 205.661,69.702 ; 196.781,53.379 208.772,67.529 ; 196.945,53.23 210.165,66.245 ; 197.084,53.078 211.456,64.816 ; 197.337,52.72 213.429,61.971 ; 197.515,52.344 214.947,58.735 ; 197.638,51.892 215.969,54.86
  Bottom Layer w0.3: 174.245,51.467 cw(c195.245,51.467) 216.245,51.467 174.245,51.467
S$16856:  | length 3
  Bottom Layer w0.254: 243.216,75.439 246.216,75.439
S$16858:  | length 3
  Bottom Layer w0.508: 237.206,75.468 240.206,75.468
S$16860:  | length 3
  Bottom Layer w0.762: 230.216,75.439 233.216,75.439
S$16862:  | length 3
  Bottom Layer w1.016: 223.216,75.439 226.216,75.439
S$16864:  | length 3
  Bottom Layer w1.27: 216.216,75.439 219.216,75.439
S$16866:  | length 3
  Bottom Layer w1.524: 209.182,75.359 212.182,75.359
S$16868:  | length 3
  Bottom Layer w1.778: 201.716,75.439 204.716,75.439
S$20208: 
S$20210: 
S$20540: 
S$21082: 
S$27498:  | length 8
  Bottom Layer w0.254: 70.603,69.236 ccw(c70.349,69.236) 70.603,69.236 ; 94.479,67.483 ccw(c94.225,67.483) 94.479,67.483 ; 97.527,46.884 ccw(c97.273,46.884) 97.527,46.884 ; 97.527,59.609 ccw(c97.273,59.609) 97.527,59.609 ; 97.527,67.483 ccw(c97.273,67.483) 97.527,67.483